# Altium PCB KillBoard.PcbDoc
Units mil, origin at the board's own origin, x right, y up, seen from the top; angles counter-clockwise.
Board outline 6000 x 4000 mil, 2 copper layers (Top Layer, Bottom Layer); 103 components, 79 nets, 313 pads, 0 vias.
Unrouted connection lines stored in the file: 198.
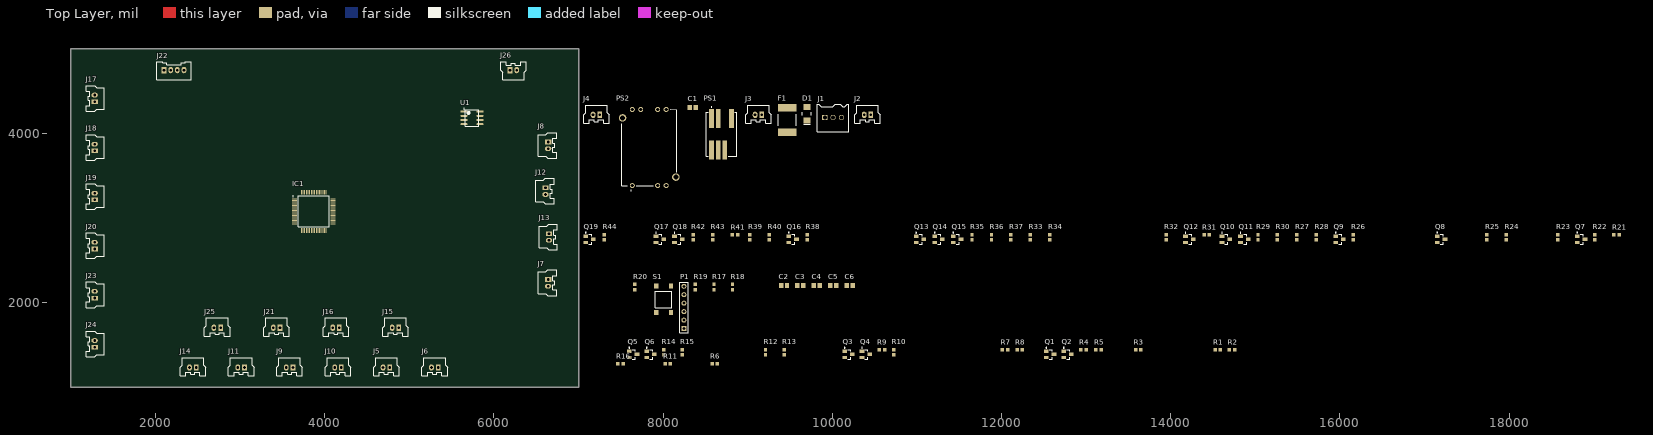
[diagram p0: Top Layer view]
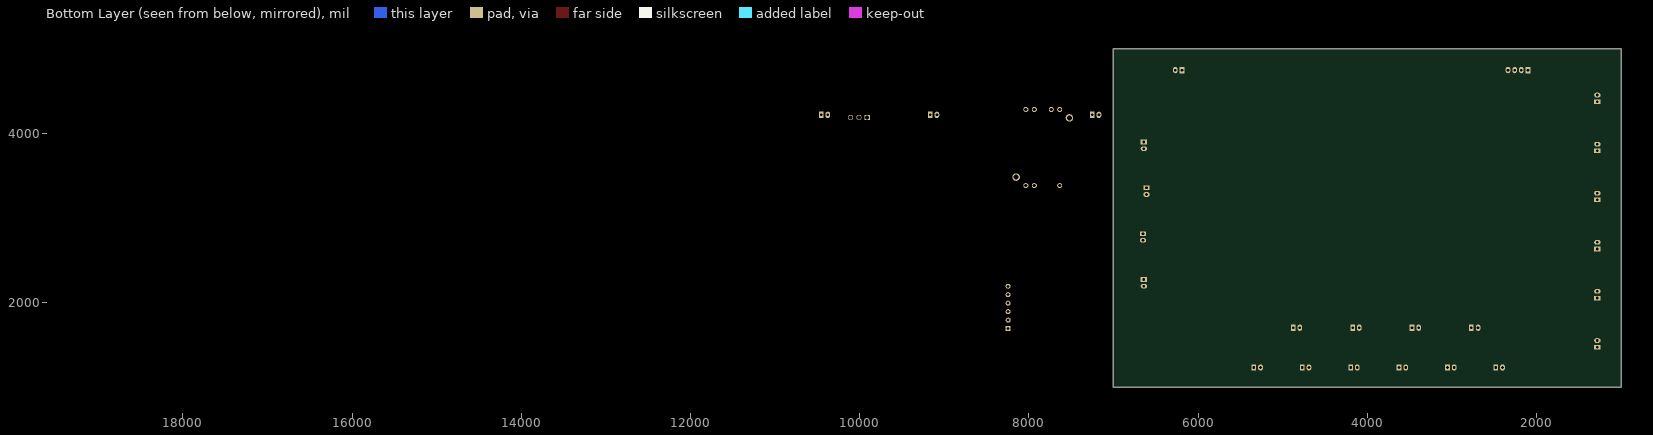
[diagram p1: Bottom Layer view, seen from below]

## Layer stack, top to bottom
Top Solder: solder mask 0.4, Solder Resist, Dk 3.5
Top Layer: signal copper 1.4
Dielectric 1: dielectric 12.6, FR-4, Dk 4.8
Bottom Layer: signal copper 1.4
Bottom Solder: solder mask 0.4, Solder Resist, Dk 3.5

## Board outline
1000,1000 7000,1000 7000,5000 1000,5000

## Design rules (kind name [scope] priority, off if disabled: settings)
Clearance [All] p1: gap=10 ignorepadtopadclearanceinfootprint=FALSE except(0: Arc-Hole Track-Hole SMDPad-Hole THPad-Hole Via-Hole Fill-Hole Poly-Hole Region-Hole Text-Hole)
PolygonConnect [All] p1: connectstyle=Relief reliefconductorwidth=10 reliefentries=4 polygonreliefangle="90 Angle" airgapwidth=10
RoomDefinition Output [InComponentClass('Output')] p1: confinementstyle=ConfineIn formatcopy=TRUE lockcomponents=FALSE outline 7045,2400 19375,2400 19375,2945 7045,2945
RoomDefinition Power [InComponentClass('Power')] p2: confinementstyle=ConfineIn formatcopy=TRUE lockcomponents=FALSE outline 7035,3270.67 10590,3270.67 10590,4460.67 7035,4460.67
RoomDefinition MCU [InComponentClass('MCU')] p3: confinementstyle=ConfineIn formatcopy=TRUE lockcomponents=FALSE outline 7045,1635 10285,1635 10285,2355 7045,2355
RoomDefinition Input [InComponentClass('Input')] p4: confinementstyle=ConfineIn formatcopy=TRUE lockcomponents=FALSE outline 7045,1060 14795,1060 14795,1585 7045,1585
RoutingVias [All] p1: holewidth=28 width=50 viastyle="Through Hole" minholewidth=28 minwidth=50 maxholewidth=28 maxwidth=50
SolderMaskExpansion [All] p1: expansion=4 istentingtop=FALSE
Width [All] p1: maxlimit=10 minlimit=10 preferedwidth=10
30 further rules are at their usual default settings.

## Classes and differential pairs
component class Power: C1 D1 F1 J1 J2 J3 J4 PS1 PS2
component class Output: " " J15 J16 J17 J18 J19 J20 J21 J22 J23 J24 J25 Q7 Q8 Q9 Q10 Q11 Q12 Q13 Q14 Q15 Q16 Q17 Q18 Q19 R21 R22 R23 R24 R25 R26 R27 R28 R29 R30 R31 R32 R33 R34 R35 R36 R37 R38 R39 R40 R41 R42 R43 R44
component class MCU: C2 C3 C4 C5 C6 IC1 J26 P1 R17 R18 R19 R20 S1 U1
component class Input: J5 J6 J7 J8 J9 J10 J11 J12 J13 J14 Q1 Q2 Q3 Q4 Q5 Q6 R1 R2 R3 R4 R5 R6 R7 R8 R9 R10 R11 R12 R13 R14 R15 R16

## Components (designator, comment, footprint, x,y, rotation, side; value= is the part's Value field where it differs from the comment)
C1 "Cap" CAPC0805 8350,4310.67 r0 top value=10uF
C2 "Cap" CAPC0805 9430,2205 r0 top value=1uF
C3 "Cap" CAPC0805 9620,2205 r0 top value=1uF
C4 "Cap" CAPC0805 9815,2205 r0 top value=1uF
C5 "Cap" CAPC0805 10010,2205 r0 top value=1uF
C6 "Cap" CAPC0805 10205,2205 r0 top value=0.01uF
D1 "VS-15MQ040NTRPBF" SS110-TP 9700,4235.67 r90 top
F1 "PTC Fuse" PTC7451X11N 9465,4160.67 r90 top value=1.1A
IC1 "TM4C123GH6PMT7" QFP50P1200X1200X160-64N 3870,3080 r0 top
J1 "24V IN" MCV_0,5/3-G-2,5 9910,4190.67 r0 top
J2 "24V OK" MOLEX-HDR-1X2-SHERLOCK-VERT 10455,4220.67 r0 top
J3 "5V OK" MOLEX-HDR-1X2-SHERLOCK-VERT 9165,4220.67 r0 top
J4 "3V3 OK" MOLEX-HDR-1X2-SHERLOCK-VERT 7250,4220.67 r0 top
J5 "PORT F KILL IND" MOLEX-HDR-1X2-SHERLOCK-VERT 4768,1234.76 r0 top
J6 "STBD F KILL IND" MOLEX-HDR-1X2-SHERLOCK-VERT 5340,1234.76 r0 top
J7 "PORT F KILL" MOLEX-HDR-1X2-SHERLOCK-VERT 6640,2275 r90 top
J8 "PORT A KILL" MOLEX-HDR-1X2-SHERLOCK-VERT 6640,3900 r90 top
J9 "PORT F KILL IND" MOLEX-HDR-1X2-SHERLOCK-VERT 3624,1234.76 r0 top
J10 "STBD F KILL IND" MOLEX-HDR-1X2-SHERLOCK-VERT 4196,1234.76 r0 top
J11 "STBD F KILL" MOLEX-HDR-1X2-SHERLOCK-VERT 3052,1234.76 r0 top
J12 "PORT A KILL IND" MOLEX-HDR-1X2-SHERLOCK-VERT 6610,3358.33 r90 top
J13 "STBD A KILL IND" MOLEX-HDR-1X2-SHERLOCK-VERT 6650,2816.67 r90 top
J14 "STBD A KILL" MOLEX-HDR-1X2-SHERLOCK-VERT 2480,1234.76 r0 top
J15 "RED IND" MOLEX-HDR-1X2-SHERLOCK-VERT 4875,1705 r0 top
J16 "KILL IND" MOLEX-HDR-1X2-SHERLOCK-VERT 4172.91,1705 r0 top
J17 "THRST 0 RELAY" MOLEX-HDR-1X2-SHERLOCK-VERT 1280,4376.26 r270 top
J18 "THRST 1 RELAY" MOLEX-HDR-1X2-SHERLOCK-VERT 1280,3796.01 r270 top
J19 "THRST 2 RELAY" MOLEX-HDR-1X2-SHERLOCK-VERT 1280,3215.76 r270 top
J20 "THRST 3 RELAY" MOLEX-HDR-1X2-SHERLOCK-VERT 1280,2635.5 r270 top
J21 "YELLOW IND" MOLEX-HDR-1X2-SHERLOCK-VERT 3470.83,1705 r0 top
J22 "STACK LIGHT" MOLEX-HDR-1X4-SHERLOCK-VERT 2100,4750 r180 top
J23 "THRST 4 RELAY" MOLEX-HDR-1X2-SHERLOCK-VERT 1280,2055.25 r270 top
J24 "THRST 5 RELAY" MOLEX-HDR-1X2-SHERLOCK-VERT 1280,1475 r270 top
J25 "GREEN IND" MOLEX-HDR-1X2-SHERLOCK-VERT 2768.74,1705 r0 top
J26 "CAN" MOLEX-HDR-1X2-SHERLOCK-VERT 6190,4750 r180 top
P1 "JTAG" HDR1X6 8245,1695 r90 top
PS1 "TDN_5-4811WISM" TDN50910WISM 8690,3990.67 r90 top
PS2 "CC3-0503SF-E" CC30503SFE 7635,3385 r90 top
Q1 "MMBT3904" MMBT3904 12575,1390 r0 top
Q2 "MMBT3904" MMBT3904 12780,1390 r0 top
Q3 "MMBT3904" MMBT3904 10190,1390 r0 top
Q4 "MMBT3904" MMBT3904 10395,1390 r0 top
Q5 "MMBT3904" MMBT3904 7645,1390 r0 top
Q6 "MMBT3904" MMBT3904 7850,1390 r0 top
Q7 "MMBT3904" MMBT3904 18850,2750 r0 top
Q8 "MMBT3904" MMBT3904 17195,2750 r0 top
Q9 "MMBT3904" MMBT3904 15995,2750 r0 top
Q10 "MMBT3904" MMBT3904 14650,2750 r0 top
Q11 "MMBT3904" MMBT3904 14870,2750 r0 top
Q12 "MMBT3904" MMBT3904 14220,2750 r0 top
Q13 "MMBT3904" MMBT3904 11035,2750 r0 top
Q14 "MMBT3904" MMBT3904 11255,2750 r0 top
Q15 "MMBT3904" MMBT3904 11475,2750 r0 top
Q16 "MMBT3904" MMBT3904 9530,2750 r0 top
Q17 "MMBT3904" MMBT3904 7960,2750 r0 top
Q18 "MMBT3904" MMBT3904 8180,2750 r0 top
Q19 "MMBT3904" MMBT3904 7130,2750 r0 top
R1 "Res" RES0603 14555,1445 r0 top value=???
R2 "Res" RES0603 14725,1445 r0 top value=???
R3 "Res" RES0603 13615,1445 r0 top value=???
R4 "Res" RES0603 12970,1445 r0 top value=???
R5 "Res" RES0603 13145,1445 r0 top value=???
R6 "Res" RES0603 8610,1280 r0 top value=???
R7 "Res" RES0603 12040,1445 r0 top value=???
R8 "Res" RES0603 12215,1445 r0 top value=???
R9 "Res" RES0603 10585,1445 r0 top value=???
R10 "Res" RES0603 10725,1415 r90 top value=???
R11 "Res" RES0603 8055,1280 r0 top value=???
R12 "Res" RES0603 9210,1415 r90 top value=???
R13 "Res" RES0603 9430,1415 r90 top value=???
R14 "Res" RES0603 8005,1415 r90 top value=???
R15 "Res" RES0603 8225,1415 r90 top value=???
R16 "Res" RES0603 7495,1280 r0 top value=???
R17 "Res" RES0603 8600,2185 r90 top value=10k
R18 "Res" RES0603 8820,2185 r90 top value=10k
R19 "Res" RES0603 8380,2185 r90 top value=10k
R20 "Res" RES0603 7665,2185 r90 top value=10k
R21 "Res" RES0603 19270,2805 r0 top value=10k
R22 "Res" RES0603 19010,2775 r90 top value=???
R23 "Res" RES0603 18575,2775 r90 top value=???
R24 "Res" RES0603 17965,2775 r90 top value=???
R25 "Res" RES0603 17735,2775 r90 top value=???
R26 "Res" RES0603 16155,2775 r90 top value=???
R27 "Res" RES0603 15490,2775 r90 top value=10k
R28 "Res" RES0603 15720,2775 r90 top value=10k
R29 "Res" RES0603 15030,2775 r90 top value=???
R30 "Res" RES0603 15260,2775 r90 top value=???
R31 "Res" RES0603 14425,2805 r0 top value=???
R32 "Res" RES0603 13945,2775 r90 top value=???
R33 "Res" RES0603 12340,2775 r90 top value=10k
R34 "Res" RES0603 12570,2775 r90 top value=10k
R35 "Res" RES0603 11650,2775 r90 top value=???
R36 "Res" RES0603 11880,2775 r90 top value=???
R37 "Res" RES0603 12110,2775 r90 top value=???
R38 "Res" RES0603 9705,2775 r90 top value=???
R39 "Res" RES0603 9025,2775 r90 top value=10k
R40 "Res" RES0603 9255,2775 r90 top value=10k
R41 "Res" RES0603 8850,2805 r0 top value=???
R42 "Res" RES0603 8355,2775 r90 top value=???
R43 "Res" RES0603 8585,2775 r90 top value=???
R44 "Res" RES0603 7305,2775 r90 top value=???
S1 "Button" PTS645xxxxSMTR92 8005,2040 r90 top
U1 "SN65HVD230DR" SOIC-8pin 5740,4185 r0 top

## Footprints (in the part's own frame and the unit in brackets; to place one, negate y for a bottom-side part, rotate by r counter-clockwise, add the part's x,y. Pads: shape width x height; smd on the part's side, far side on the other; paste and mask are expansions set on the pad)
CAPC0805 [mm] "Chip Capacitor, 2-Leads, Body 2.01x1.25mm, IPC Medium Density"
  rect 1.3x1.5 smd: 1(-0.875,0) 2(0.875,0)
  body extent -1.1,-0.72 1.11,0.72, height 1.8
CC30503SFE [mm]
  round 1.5 hole 1: 1(0,0) 2(0,-7.62) 3(0,-10.16) 4(22.86,-10.16) 5(22.86,-7.62) 6(22.86,-2.54) 7(22.86,0)
  round 2.25 hole 1.5: MH1(2.54,-13.08) MH2(20.32,2.92)
  silkscreen extent -1.57,-13.38 22.86,3.22, body extent -0.12,-13.38 23.04,3.22, height 8.5
HDR1X6 [mm] "Connector; Header; 6 Position"
  rect 1.5x1.5 hole 0.9: 1(0,0)
  round 1.5 hole 0.9: 2(2.54,0) 3(5.08,0) 4(7.62,0) 5(10.16,0) 6(12.7,0)
  silkscreen extent -1.27,-1.27 13.97,1.27
MCV_0,5/3-G-2,5 [mil] "CONN TERM BLOCK 2.50MM 3POS"
  rect 60x60 hole 47.24: 1(0,0)
  round 60 hole 47.24: 2(98.43,0) 3(196.85,0)
  silkscreen extent -90,-167 286,156, body extent -87,-165 283,154, height 398
MMBT3904 [mm] "SOT23, 3-Leads, Body 2.92x2.40mm, Pitch 0.95mm, IPC Medium Density"
  rect 1.4x1 smd: B(-1.15,0.95) C(1.15,0) E(-1.15,-0.95)
  silkscreen extent -1.27,-1.45 0.65,2.12, body extent -0.65,-1.46 0.65,1.46, height 1.2
MOLEX-HDR-1X2-SHERLOCK-VERT [mm]
  rect 1.397x1.905 hole 0.8: 1(0,0)
  oval 1.397x1.905 hole 0.8: 2(-2,0)
  silkscreen extent -4.85,-2.55 2.85,2.95, body extent -4.87,-2.59 2.83,2.96, height 8.5
MOLEX-HDR-1X4-SHERLOCK-VERT [mm]
  rect 1.397x1.905 hole 0.8: 1(0,0)
  oval 1.397x1.905 hole 0.8: 2(-2,0) 3(-4,0) 4(-6,0)
  silkscreen extent -8.15,-2.55 2.15,2.95, body extent -8.13,-2.57 2.17,2.98, height 8.5
PTC7451X11N [mm] "Chip PTC, 2920, 7351 metric 2-Leads, Body 7.36x5.12mm, IPC Medium Density"
  rect 2.3x5.6 smd: 1(-3.7,0) 2(3.7,0)
  silkscreen extent -1.75,-2.7 1.75,2.7, body extent -3.99,-2.72 3.99,2.72, height 1.15
PTS645xxxxSMTR92 [mm] "PTS645 Series SMT 6 mm Tactile Switch"
  rect 1.555x1.3 smd: A(-3.975,2.25) A(3.975,2.25) B(-3.975,-2.25) B(3.975,-2.25)
  silkscreen extent -2.5,-2.5 2.5,2.5, body extent -3,-3 3,3, height 4.5
QFP50P1200X1200X160-64N [mm]
  rect 1.475x0.3 smd: 1(-5.738,3.75) 2(-5.738,3.25) 3(-5.738,2.75) 4(-5.738,2.25) 5(-5.738,1.75) 6(-5.738,1.25) 7(-5.738,0.75) 8(-5.738,0.25) 9(-5.738,-0.25) 10(-5.738,-0.75) 11(-5.738,-1.25) 12(-5.738,-1.75) 13(-5.738,-2.25) 14(-5.738,-2.75) 15(-5.738,-3.25) 16(-5.738,-3.75) 33(5.738,-3.75) 34(5.738,-3.25) 35(5.738,-2.75) 36(5.738,-2.25) 37(5.738,-1.75) 38(5.738,-1.25) 39(5.738,-0.75) 40(5.738,-0.25) 41(5.738,0.25) 42(5.738,0.75) 43(5.738,1.25) 44(5.738,1.75) 45(5.738,2.25) 46(5.738,2.75) 47(5.738,3.25) 48(5.738,3.75)
  rect 0.3x1.475 smd: 17(-3.75,-5.738) 18(-3.25,-5.738) 19(-2.75,-5.738) 20(-2.25,-5.738) 21(-1.75,-5.738) 22(-1.25,-5.738) 23(-0.75,-5.738) 24(-0.25,-5.738) 25(0.25,-5.738) 26(0.75,-5.738) 27(1.25,-5.738) 28(1.75,-5.738) 29(2.25,-5.738) 30(2.75,-5.738) 31(3.25,-5.738) 32(3.75,-5.738) 49(3.75,5.738) 50(3.25,5.738) 51(2.75,5.738) 52(2.25,5.738) 53(1.75,5.738) 54(1.25,5.738) 55(0.75,5.738) 56(0.25,5.738) 57(-0.25,5.738) 58(-0.75,5.738) 59(-1.25,5.738) 60(-1.75,5.738) 61(-2.25,5.738) 62(-2.75,5.738) 63(-3.25,5.738) 64(-3.75,5.738)
  silkscreen extent -6.35,-4.65 4.65,4.65, body extent -6.01,-6.01 6.01,6.01, height 1.5
RES0603 [mm] "Chip Resistor, 2-Leads, Body 1.60x0.80mm, IPC Medium Density"
  rect 1.05x1 smd: 1(-0.8,0) 2(0.8,0)
  body extent -0.88,-0.48 0.87,0.47, height 0.8
SOIC-8pin [mm] "For 296-1345-1-ND"
  oval 2.2x0.6 smd: 1(-2.4,1.905) 2(-2.4,0.635) 3(-2.4,-0.635) 4(-2.4,-1.905) 5(2.4,-1.905) 6(2.4,-0.635) 7(2.4,0.635) 8(2.4,1.905)
  silkscreen extent -2.52,-2.5 2,2.88, body extent -2,-2.5 2,2.5, height 1.75
SS110-TP [mil] "DIODE SCHOTTKY 100V 1A SMA"
  rect 70x85 smd: A(80,0) C(-80,0)
  silkscreen extent -127,-53 18,53, body extent -84,-52 84,52, height 116
TDN50910WISM [mm]
  rect 5.7x1.4 smd: 1(4.75,3) 2(4.75,1) 4(4.75,-3) 5(-4.75,3) 6(-4.75,1) 7(-4.75,-1)
  silkscreen extent -6.6,-4.55 8.3,4.55, body extent -7.15,-4.55 7.05,4.55, height 10.15

## Part data
C1 C2 C3 C4 C5 C6: Supplier Part Number 1=490-3905-1-ND, Supplier 1=Digi-Key
D1: "DIODE SCHOTTKY 40V 1.5A SMA", Manufacturer 1="Vishay Semiconductor Diodes Division", Supplier Part Number 1=15MQ040NPBFCT-ND, Manufacturer Part Number 1=VS-15MQ040NTRPBF, Supplier 1=Digi-Key
F1: library part PTC_Fuse, Supplier Part Number 1=507-1744-1-ND, Supplier 1=Digi-Key
IC1: "Integrated Circuit", Manufacturer_Name="Texas Instruments", Mouser2 Part Number=595-TM4C123GH6PMT7, Datasheet Link=http://www.ti.com/lit/gpn/TM4C123GH6PM, Height=1.6mm, Manufacturer_Part_Number=TM4C123GH6PMT7, Mouser2 Price/Stock=https://www.mouser.com/Search/Refine.aspx?Keyword=595-TM4C123GH6PMT7
J1: library part MCV_0,5/3-G-2,5, "CONN TERM BLOCK 2.50MM 3POS, Vertical, Through-Hole, 4A", Manufacturer 1="Phoenix Contact", Manufacturer Part Number 1=1881561, Supplier Part Number 1=277-1453-ND, Mating Connector=277-1431-ND, Supplier 1=Digi-Key
J2 J3 J4 J5 J6 J7 J8 J9 J10 J11 J12 J13 J14 J15 J16 J17 J18 J19 J20 J21 J23 J24 J25 J26: library part MOLEX-HDR-1x2-SHERLOCK_VERT, "Header, Molex, 2mm Pitch Sherlock Header, Single Row, Vertical, 2 Circuits, Length 3.3mm, 0353620250"
J22: library part MOLEX-HDR-1x4-SHERLOCK_VERT, "Header, Molex, 2mm Pitch Sherlock Header, Single Row, Vertical, 4 Circuits, Length 3.3mm, 0353620450"
P1: library part "Header 6", "Header, 6-Pin", LatestRevisionDate=17-Jul-2002, LatestRevisionNote="Re-released for DXP Platform.", Publisher="Altium Limited"
PS1: "Power Supply", Manufacturer_Name="Traco Power", Manufacturer_Part_Number="TDN 5-4811WISM", Mouser Part Number=495-TDN5-4811WISM, Datasheet Link=https://tracopower.com/tdn5wism-datasheet/, Height=10.7mm, Mouser Price/Stock=https://www.mouser.co.uk/ProductDetail/TRACO-Power/TDN-5-4811WISM?qs=oIMkNKxjiKV4kofP0H7hzw%3D%3D
PS2: "Power Supply", Manufacturer_Name=TDK, Datasheet Link=https://product.tdk.com/system/files/dam/doc/product/power/switching-power/dc-dc-converter/catalog/cc-e_e.pdf, Height=8.5mm, Manufacturer_Part_Number=CC3-0503SF-E
Q1 Q2 Q3 Q4 Q5 Q6 Q7 Q8 Q9 Q10 Q11 Q12 Q13 Q14 Q15 Q16 Q17 Q18 Q19: "TRANS NPN 40V 0.2A SOT-23", Manufacturer 1="Fairchild Semiconductor", Supplier Part Number 1=MMBT3904FSCT-ND, Manufacturer Part Number 1=MMBT3904, Supplier 1=Digi-Key
R1 R2 R3 R4 R5 R6 R7 R8 R9 R10 R11 R12 R13 R14 R15 R16 R17 R18 R19 R20 R21 R22 R23 R24 R25 R26 R27 R28 R29 R30 R31 R32 R33 R34 R35 R36 R37 R38 R39 R40 R41 R42 R43 R44: Supplier Part Number 1=RMCF0603JT10K0CT-ND, Supplier 1=Digi-Key
S1: "SPST Button", Supplier Part Number 1=CKN9087CT-ND, Supplier 1=Digi-Key
U1: "IC TXRX CAN 1MBPS 3.3V 8SOIC", Supplier Part Numbe 1=296-11654-1-ND, Supplier 1=Digi-Key

## Nets (pads, with @x,y where several pads share a name; then routed paths per layer and width w, separated by ;. In a path a pad name is that pad's centre, name@x,y a point inside that pad or via, vN(x,y) a via of type N, cw(c..) or ccw(c..) an arc to the next point about the centre after c; other vN are vias at no path point)
3.3v: IC1.37 R21.1
3V3: C5.1 C6.1 IC1.2 IC1.11 IC1.26 IC1.42 IC1.54 J4.1 PS2.7 R1.1 R2.1 R3.1 R6.1 R7.1 R8.1 R11.1 R12.1 R13.1 R16.1 R17.1 R18.1 R19.1 R23.1 R24.1 R32.1 R41.1 U1.3
5V: C1.1 J3.1 PS1.7 PS2.1
24V: F1.1 J2.1 J17.1 J18.1 J19.1 J20.1 J22.1 J23.1 J24.1 PS1.1
CAN_RX0: IC1.28 U1.4
CAN_TX0: IC1.31 U1.1
CANH_A: J26.2 U1.7
CANL_A: J26.1 U1.6
GND: C1.2 C2.2 C3.2 C4.2 C5.2 C6.2 IC1.3 IC1.12 IC1.27 IC1.32 IC1.34 IC1.35 IC1.39 IC1.40 IC1.55 J1.3 J2.2 J3.2 J4.2 J7.1 J8.1 J11.1 J14.1 P1.6 PS1.2 PS1.6 PS2.2 PS2.3 PS2.5 Q1.E Q2.E Q3.E Q4.E Q5.E Q6.E Q7.E Q8.E Q9.E Q10.E Q11.E Q12.E Q13.E Q14.E Q15.E Q16.E Q17.E Q18.E Q19.E R20.2 R27.1 R28.1 R33.1 R34.1 R39.1 R40.1 S1.B U1.2 U1.8
GREEN: IC1.6 R38.1 R44.1
GREEN_LT: J22.4 Q16.C
KILL: IC1.9 R26.1 R27.2 R28.2 R29.1 R30.1 R33.2 R34.2 R36.1 R37.1 R39.2 R40.2 R42.1 R43.1
NetD1_A: D1.A J1.1
NetD1_C: D1.C F1.2
NetJ5_1: J5.1 R1.2
NetJ5_2: J5.2 Q1.C
NetJ6_1: J6.1 R2.2
NetJ6_2: J6.2 Q2.C
NetJ9_1: J9.1 R7.2
NetJ9_2: J9.2 Q3.C
NetJ10_1: J10.1 R8.2
NetJ10_2: J10.2 Q4.C
NetJ12_1: J12.1 R12.2
NetJ12_2: J12.2 Q5.C
NetJ13_1: J13.1 R13.2
NetJ13_2: J13.2 Q6.C
NetJ15_1: J15.1 R23.2
NetJ15_2: J15.2 Q8.C
NetJ16_1: J16.1 R24.2
NetJ16_2: J16.2 Q9.C
NetJ17_2: J17.2 Q10.C
NetJ18_2: J18.2 Q11.C
NetJ19_2: J19.2 Q14.C
NetJ20_2: J20.2 Q15.C
NetJ21_1: J21.1 R32.2
NetJ21_2: J21.2 Q13.C
NetJ23_2: J23.2 Q17.C
NetJ24_2: J24.2 Q18.C
NetJ25_1: J25.1 R41.2
NetJ25_2: J25.2 Q19.C
NetQ1_B: Q1.B R4.2
NetQ2_B: Q2.B R5.2
NetQ3_B: Q3.B R9.2
NetQ4_B: Q4.B R10.2
NetQ5_B: Q5.B R14.2
NetQ6_B: Q6.B R15.2
NetQ7_B: Q7.B R22.2
NetQ8_B: Q8.B R25.2
NetQ9_B: Q9.B R26.2
NetQ10_B: Q10.B R29.2
NetQ11_B: Q11.B R30.2
NetQ12_B: Q12.B R31.2
NetQ13_B: Q13.B R35.2
NetQ14_B: Q14.B R36.2
NetQ15_B: Q15.B R37.2
NetQ16_B: Q16.B R38.2
NetQ17_B: Q17.B R42.2
NetQ18_B: Q18.B R43.2
NetQ19_B: Q19.B R44.2
NRST: IC1.38 P1.5 R19.2 S1.A
PORT_A_KILL_SW: IC1.15 J8.2 R6.2
PORT_F_KILL_SW: IC1.16 J7.2 R3.2
RED: IC1.8 R21.2 R22.1 R25.1
RED_LT: J22.2 Q7.C
STBD_A_KILL_SW: IC1.13 J14.2 R16.2
STBD_F_KILL_SW: IC1.14 J11.2 R11.2
TCK/SWCLK: IC1.52 P1.1 R17.2
TDI: IC1.50 P1.3
TDO/SWO: IC1.49 P1.4 R20.1
THRST_0_KILL_IND: IC1.64 R4.1
THRST_1_KILL_IND: IC1.62 R5.1
THRST_2_KILL_IND: IC1.63 R9.1
THRST_3_KILL_IND: IC1.61 R10.1
THRST_4_KILL_IND: IC1.58 R14.1
THRST_5_KILL_IND: IC1.57 R15.1
TMS/SWDIO: IC1.51 P1.2 R18.2
VDDC: C2.1 C3.1 C4.1 IC1.25 IC1.56
YELLOW: IC1.7 R31.1 R35.1
YELLOW_LT: J22.3 Q12.C
pads on no net: IC1.1 IC1.4 IC1.5 IC1.10 IC1.17 IC1.18 IC1.19 IC1.20 IC1.21 IC1.22 IC1.23 IC1.24 IC1.29 IC1.30 IC1.33 IC1.36 IC1.41 IC1.43 IC1.44 IC1.45 IC1.46 IC1.47 IC1.48 IC1.53 IC1.59 IC1.60 J1.2 PS1.4 PS1.5 PS2.4 PS2.6 PS2.MH1 PS2.MH2 U1.5